# Altium PCB LED Module_v2_PCB.PcbDoc
Units mm, origin at the board's own origin, x right, y up, seen from the top; angles counter-clockwise.
Board outline 22.5 x 38.5 mm, 2 copper layers (Top Layer, Bottom Layer), stack 1.571 mm thick; 3 components, 3 nets, 12 pads, 0 vias.
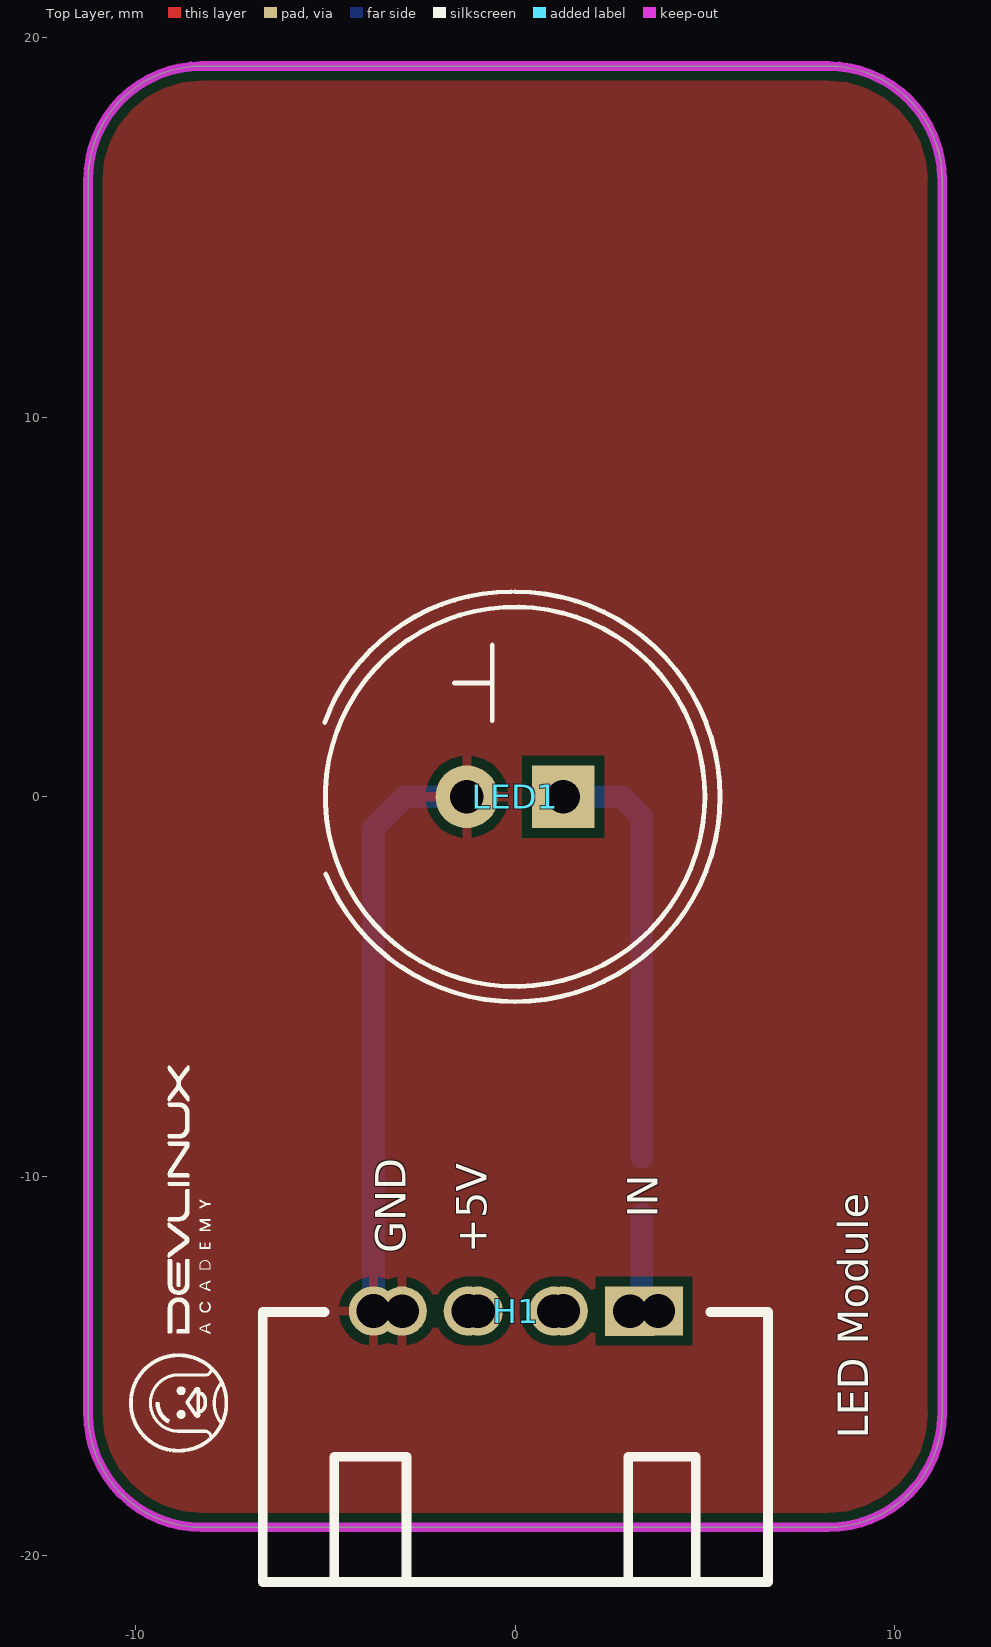
[diagram p0: Top Layer view]
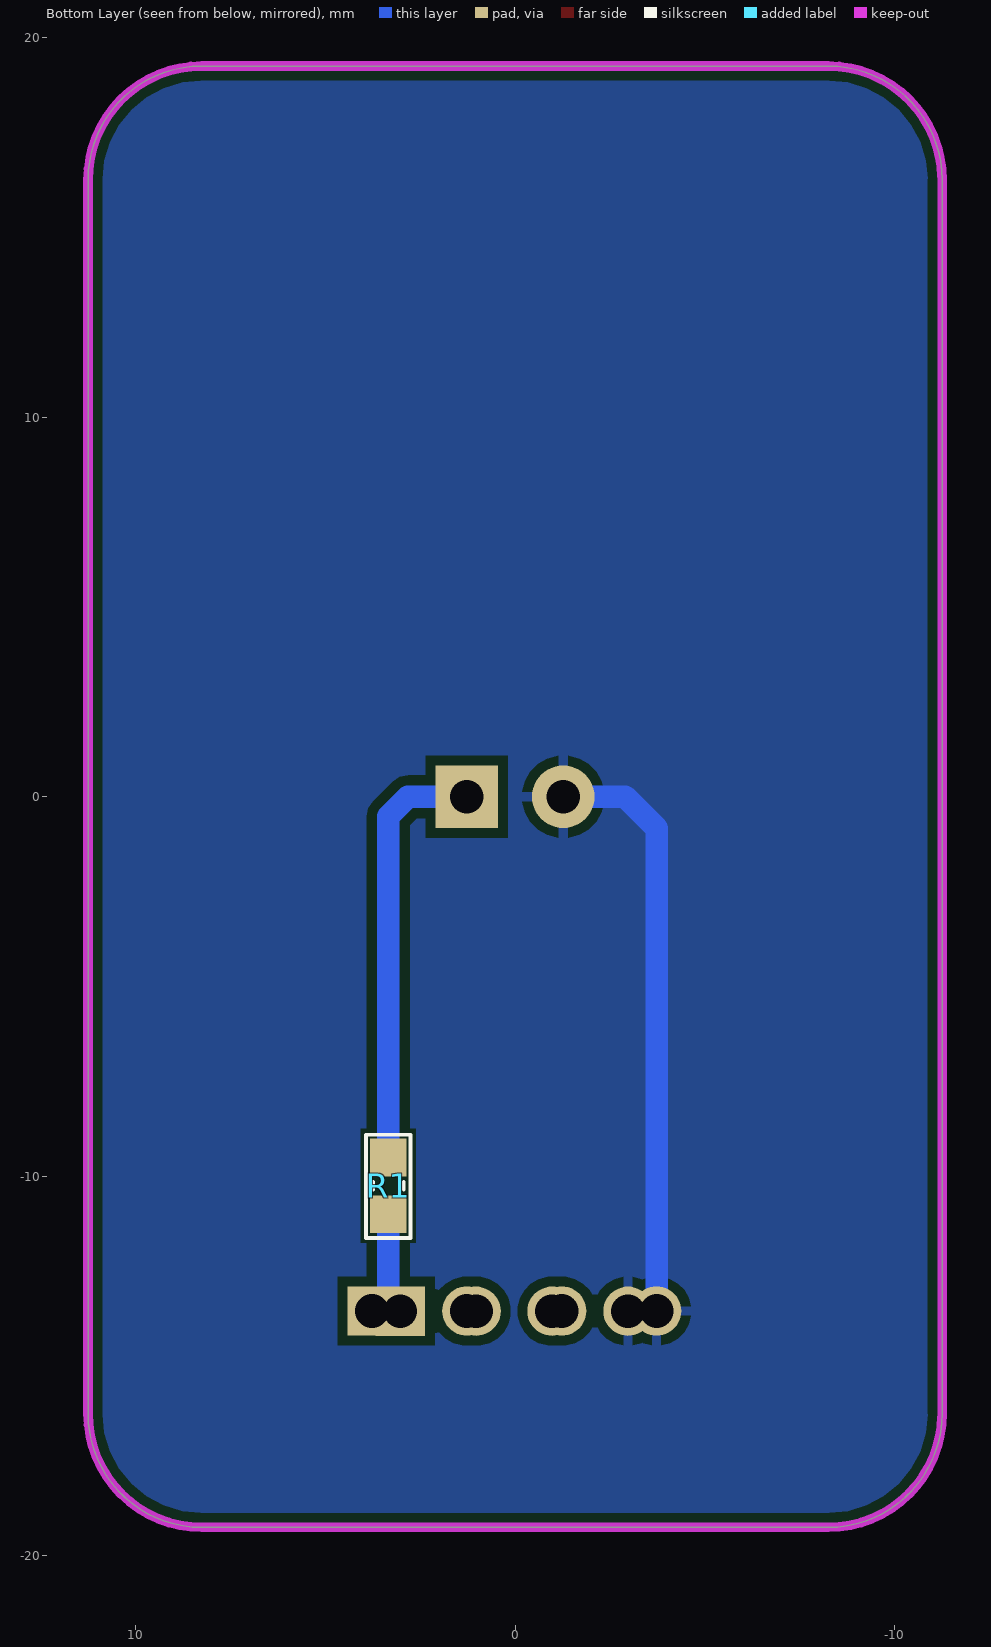
[diagram p1: Bottom Layer view, seen from below]

## Layer stack, top to bottom
Top Solder: solder mask 0.0102, Solder Resist, Dk 3.5
Top Layer: signal copper 0.0356
Dielectric 1: dielectric 1.5, FR-4, Dk 4.8
Bottom Layer: signal copper 0.0356
Bottom Solder: solder mask 0.0102, Solder Resist, Dk 3.5

## Board outline
-11.25,-16.25 -11.25,16.25 cw(c-8.25,16.25) -8.25,19.25 8.25,19.25 cw(c8.25,16.25) 11.25,16.25 11.25,-16.25 cw(c8.25,-16.25) 8.25,-19.25 -8.25,-19.25 cw(c-8.25,-16.25)

## Design rules (kind name [scope] priority, off if disabled: settings)
Clearance [All] p1: gap=0.254 ignorepadtopadclearanceinfootprint=FALSE except(0: Arc-Hole Track-Hole SMDPad-Hole THPad-Hole Via-Hole Fill-Hole Poly-Hole Region-Hole Text-Hole; 0.178: Arc-SMDPad Arc-THPad Track-SMDPad Track-THPad SMDPad-SMDPad SMDPad-THPad THPad-THPad)
PolygonConnect [All] p1: connectstyle=Relief reliefconductorwidth=0.254 reliefentries=4 polygonreliefangle="90 Angle" airgapwidth=0.254
RoomDefinition "LED Module_v2_SCH" [InComponentClass('LED Module_v2_SCH')] p1: confinementstyle=ConfineIn formatcopy=TRUE lockcomponents=FALSE outline 52.414,-10.936 66.13,-10.936 66.13,20.306 52.414,20.306
RoutingVias [All] p1: holewidth=0.4 width=0.8 viastyle="Through Hole" minholewidth=0.3 minwidth=0.6 maxholewidth=0.5 maxwidth=1
SolderMaskExpansion [All] p1: expansion=0.102 istentingtop=FALSE
Width +5V [All] p1: maxlimit=0.6 minlimit=0.4 preferedwidth=0.5
Width NET [All] p2: maxlimit=0.5 minlimit=0.3 preferedwidth=0.4
30 further rules are at their usual default settings.

## Components (designator, comment, footprint, x,y, rotation, side; value= is the part's Value field where it differs from the comment)
H1 "Header 4P 2.54 + 2.0 Duc Cong" "Header 4P DC 2.54 + 2.0" 3.745,-13.575 r270 top
LED1 "LED 10mm" LED2-2.54-D10MM 0,0 r180 top
R1 "470" "tro smd 0603" 3.34,-10.25 r270 bottom

## Footprints (in the part's own frame and the unit in brackets; to place one, negate y for a bottom-side part, rotate by r counter-clockwise, add the part's x,y. Pads: shape width x height; smd on the part's side, far side on the other; paste and mask are expansions set on the pad)
"Header 4P DC 2.54 + 2.0" [mm]
  rect 1.3x1.3 hole 0.889: 1(-0.025,0.025) 1(-0.022,-0.719)
  round 1.3 hole 0.889: 2(-0.025,-2.475) 2(-0.022,-2.719) 3(-0.025,-4.975) 3(-0.022,-4.719) 4(-0.025,-7.475) 4(-0.022,-6.718)
  silkscreen extent 0,-10.39 7.11,2.92, body extent 0.13,-10.48 7.06,3.11, height 7.38
LED2-2.54-D10MM [mil]
  round 65 hole 35: NEG(49.99,0)
  rect 65x65 hole 35: POS(-49.99,0)
  silkscreen extent -213,-213 197,213
"tro smd 0603" [mm] "Chip Capacitor, 2-Leads, Body 1,60x0,80mm, IPC Medium Density"
  rect 1x0.95 smd mask+0.076: 1(-0.75,0) 2(0.75,0)
  silkscreen extent -1.35,-0.58 1.37,0.58, body extent -0.82,-0.42 0.82,0.43, height 0.44

## Part data
H1: "Cắm", Chung_Loai=Cắm, Don_Vi=Con, Ma_Hang=MH001310, Ten_Linh_Kien="Header 4P XH2.54-4P Đực Cong"
LED1: "304090142", Package=None, Availability=Unavailable, MP=DIP-LED-BLUE-BLUE-10MM(2P-D10MM), Price=None
R1: library part "Tro 0603 5% 330R", "Dán", Chung_Loai=Dán, Don_Vi=Con, Ma_Hang=MH006910, So_Chan=2, Ten_Linh_Kien="Trở 0603 5% 330R"

## Nets (pads, with @x,y where several pads share a name; then routed paths per layer and width w, separated by ;. In a path a pad name is that pad's centre, name@x,y a point inside that pad or via, vN(x,y) a via of type N, cw(c..) or ccw(c..) an arc to the next point about the centre after c; other vN are vias at no path point)
GND: H1.4 LED1.NEG | length 15.5
  Bottom Layer w0.6: H1.4@-3.73,-13.55 -3.73,-0.83 -2.9,0 LED1.NEG
NetH1_1: H1.1 R1.2 | length 2.7
  Bottom Layer w0.6: R1.2 3.34,-13.12 H1.1@3.77,-13.55
NetLED1_POS: LED1.POS R1.1 | length 11.3
  Bottom Layer w0.6: LED1.POS 2.82,0 3.34,-0.52 R1.1
pads on no net: H1.2 H1.3

## Polygon pours and split planes (outlines as drawn)
GND on Bottom Layer "NONET_L-01_P-001" (solid, remove dead copper, pour order 0): -11.25,19.25 11.25,19.25 11.25,-19.25 -11.25,-19.25
GND on Top Layer "NONET_L-01_P-001" (solid, remove dead copper, pour order 1): -11.25,-19.237 11.237,-19.237 11.25,-19.25 11.25,19.25 -11.25,19.25

## Keep-outs
Keep-Out Layer:
  the board outline again, w0.254

## Silkscreen, mask and mechanical layers (free items; w line width, h text height)
Top Overlay:
  drawing of 21 lines, arcs and shapes, not listed
  text "IN" at 3.76,-11.097 h0.8 r90
  text "GND" at -2.884,-12.03 h0.8 r90
  text "+5V" at -0.744,-12.03 h0.8 r90
  text "LED Module" at 9.31,-16.92 h0.8 r90